# Altium PCB FRONT-UNIT-7.PcbDoc (part 2 of 2)
Units mm, origin at the board's own origin, x right, y up, seen from the top; angles counter-clockwise.
Board outline 281 x 128.5 mm, 2 copper layers (Top Layer, Top, Bottom Layer, Bottom), stack 1.671 mm thick; 95 components, 85 nets, 388 pads, 394 vias.
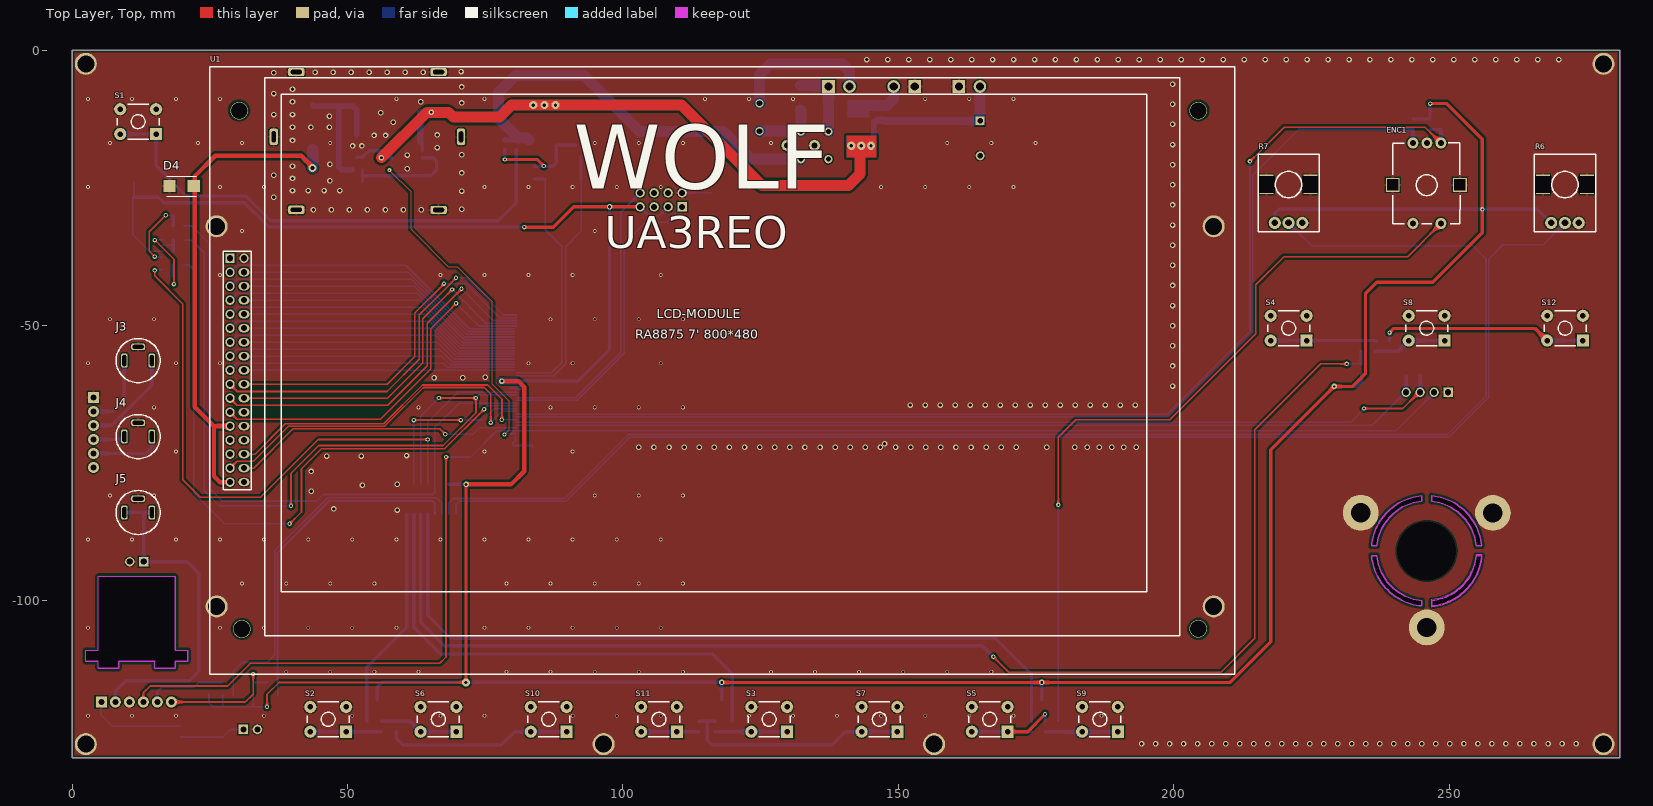
[diagram p0: Top Layer, Top view]

## Keep-outs (continued)
Keep-Out Layer, Board: (continued)
  lines w0.254: 235.9,-91.775 236.85,-91.775 ; 235.899,-91.773 ccw(c245.9,-90.925) 245.046,-100.925 ; 235.907,-90.026 cw(c245.9,-90.925) 245.036,-80.929 ; 235.925,-90.025 236.875,-90.025 cw(c245.9,-90.925) 245.027,-81.897 ; 236.866,-91.794 ccw(c245.9,-90.925) 245.051,-99.961 ; 245.05,-100.9 245.05,-99.975 ; 245.05,-81.9 245.05,-80.95 ; 246.8,-81.9 246.8,-80.95 ; 246.802,-81.909 cw(c245.9,-90.925) 254.915,-90.014 ; 246.806,-80.929 cw(c245.9,-90.925) 255.896,-90.023 ; 246.825,-100.9 246.825,-99.975 ; 246.846,-100.913 ccw(c245.9,-90.925) 255.895,-91.802 ; 246.846,-99.941 ccw(c245.9,-90.925) 254.923,-91.797 ; 254.925,-91.775 255.85,-91.775 ; 254.925,-90.025 255.875,-90.025

## Other copper
Top Layer, Top:
  rectangle net +12: 140.55,-19.5 146,-15.525
Bottom Layer, Bottom:
  rectangle net +12: 140.55,-19.5 146,-16.275
  rectangle net NetF2_2: 140.75,-12.25 144.75,-9.075
  rectangle net +3V3: 77.35,-60.75 78.8,-59.45
  region net +12: 147.225,-12.1 147.2,-12.075 145.975,-12.075 145.075,-12.975 145.075,-15.45 145,-15.525 140.55,-15.525 140.55,-17.025 145.775,-17.025 146,-16.8 146,-13.675 146.3,-13.375 148.5,-13.375

## Silkscreen, mask and mechanical layers (free items; w line width, h text height)
Top Overlay:
  text "WOLF" at 91.1,-29.025 h20
  text "UA3REO" at 96.7,-37.9 h10
Bottom Overlay:
  circle w0.254: c245.9,-90.925 r19
  text "WOLF" at 151.425,-55.55 h20
  text "UA3REO" at 148.025,-64.525 h10
  text "+5V" at 13.55,-120.125 h1.5 r90
  text "GND" at 10.925,-120.15 h1.5 r90
  text "PTT" at 5.925,-120.175 h1.5 r90
  text "MIC" at 8.35,-120.2 h1.5 r90
  text "A" at 15.725,-121.05 h1.5
  text "B" at 18.4,-121.075 h1.5
  text "FRONT-UNIT-7 rev6" at 258,-121.5 h1.52
Bottom Solder, Bot Mask:
  rectangle: 3.9,-108.875 4.625,-108.325
  rectangle: 18.875,-108.875 19.45,-108.125
  rectangle: 3.675,-111.9 4.625,-111.125
  rectangle: 8.625,-111.95 9.325,-111.125
  rectangle: 14.025,-111.975 14.875,-111.125
  rectangle: 18.875,-111.925 20.125,-111.125
  lines w1: 1.875,-111.625 1.875,-108.375 4.125,-108.375 4.125,-94.875 19.375,-94.875 19.375,-108.375 21.625,-108.375 21.625,-111.625 19.375,-111.625 19.375,-112.875 14.375,-112.875 14.375,-111.625 9.125,-111.625 9.125,-112.875 4.125,-112.875 4.125,-111.625 1.875,-111.625
  lines w2: 36.625,-28.9 36.625,-4 70.75,-4 70.75,-29.044 36.706,-28.95

## Text inside footprints (layer, text, board x,y; h text height)
ENCODER_MAIN1: Mechanical 2, Bot Assy "BOARD EDGE" at 246.295,-59.25 h0.42 r180
ESP-1: Bottom Overlay "ESP8266" at 113.213,-14.599 h1.67; Bottom Overlay "ESP-01" at 112.441,-19.379 h1.67
U1: Top Overlay "RA8875 7' 800*480" at 102.216,-52.403 h1.67; Top Overlay "LCD-MODULE" at 106.153,-48.72 h1.67